# Altium PCB Sensor_PCB_S201_Flex_Sourav.PcbDoc
Units mm, origin at the board's own origin, x right, y up, seen from the top; angles counter-clockwise.
Board outline 122 x 4.1 mm, 2 copper layers (1-SIG-TOP, 2-SIG_BOT), stack 0.109 mm thick; 21 components, 17 nets, 66 pads, 217 vias.
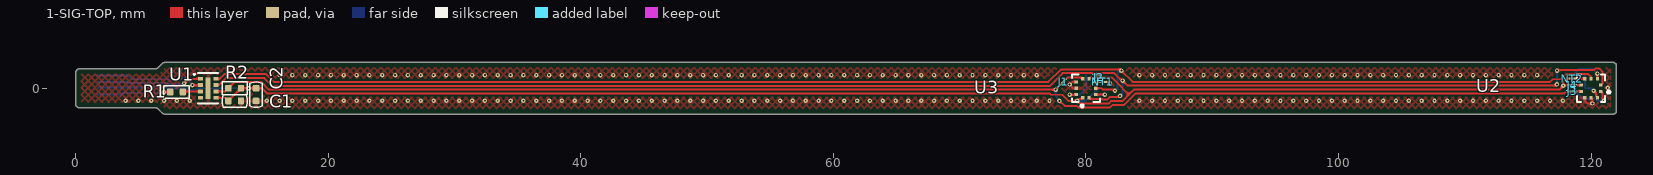
[diagram p0: 1-SIG-TOP view]
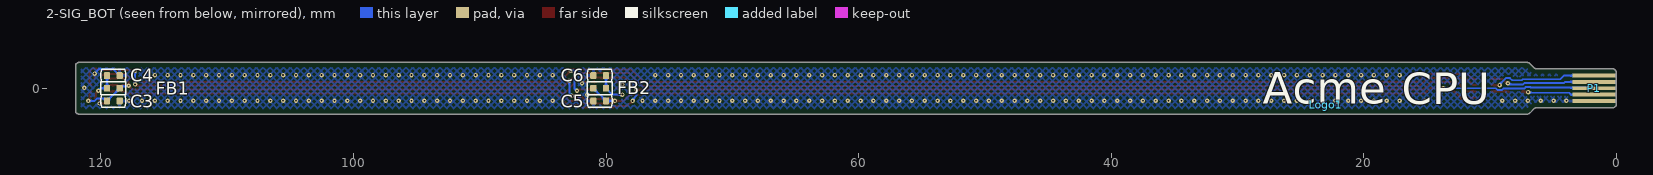
[diagram p1: 2-SIG_BOT view, seen from below]
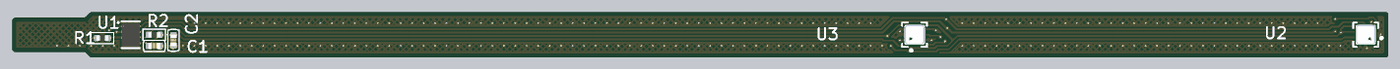
[diagram p2: 3D render of the assembled board from above, using the file's embedded part models]
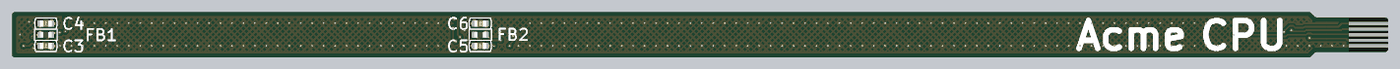
[diagram p3: 3D render of the assembled board from below, using the file's embedded part models]

## Layer stack, top to bottom
Top Solder: solder mask 0.0275, PI + Adhesive, Dk 3.4
1-SIG-TOP: signal copper 0.035
Dielectric 1: dielectric 0.0385, PI, Dk 3.4
2-SIG_BOT: signal copper 0.035
Bottom Solder: solder mask 0.0275, PI + Adhesive, Dk 3.4

## Board outline
6.342,-1.55 cw(c6.346,-1.814) 6.529,-1.624 6.852,-1.948 ccw(c7.1,-1.7) 7.099,-2.05 121.69,-2.05 ccw(c121.695,-1.695) 122,-1.877 122,1.878 ccw(c121.695,1.695) 121.701,2.05 7.1,2.05 ccw(c7.1,1.7) 6.852,1.948 6.529,1.625 cw(c6.353,1.802) 6.353,1.552 0.352,1.552 ccw(c0.352,1.2) 0,1.2 0,-1.2 ccw(c0.325,-1.225) 0.3,-1.55

## Design rules (kind name [scope] priority, off if disabled: settings)
BoardOutlineClearance BoardOutlineClearance_LayerStack [WithinRoom('PCB_Stackup')] p1: gap=0 ignorepadtopadclearanceinfootprint=FALSE
BoardOutlineClearance BoardOutlineClearance_EDGE_Connector [HasFootprint('5-PIN FPC BOARD EDGE CONNECTOR 0.5MM')] p2: gap=0 ignorepadtopadclearanceinfootprint=FALSE
BoardOutlineClearance BoardOutlineClearance_LayerNames [WithinRoom('Layer_Names')] p3: gap=0 ignorepadtopadclearanceinfootprint=FALSE
BoardOutlineClearance BoardOutlineClearance_Overlays [OnBottomSilkscreen or OnTopSilkscreen] p4: gap=0 ignorepadtopadclearanceinfootprint=FALSE
BoardOutlineClearance BoardOutlineClearance_NearEdgeConnector [WithinRoom('NearEdgeConnector_OutlineClearance')] p5 off: gap=0.35 ignorepadtopadclearanceinfootprint=FALSE
BoardOutlineClearance [All] p6: gap=0.35 ignorepadtopadclearanceinfootprint=FALSE
Clearance [All] p1: gap=0.152 ignorepadtopadclearanceinfootprint=FALSE
ComponentClearance ComponentClearance_NetTie [HasFootprint('Net Tie 6x30mil')] p1: gap=0 collisioncheckmode=3 verticalgap=0 showdistances=FALSE
ComponentClearance ComponentClearance_PCB_Stackup [WithinRoom('PCB_Stackup')] p2: gap=0 collisioncheckmode=3 verticalgap=0 showdistances=FALSE
ComponentClearance [All] p3: gap=0.305 collisioncheckmode=3 verticalgap=0 showdistances=FALSE
DiffPairsRouting [All] p1: maxlimit=0.152 minlimit=0.127 mostfreqgap=0.152 toplayer_minwidth=0.127 toplayer_maxwidth=0.152 toplayer_prefwidth=0.152 bottomlayer_minwidth=0.127 bottomlayer_maxwidth=0.152 bottomlayer_prefwidth=0.152 maxuncoupledlength=12.7
HoleSize [All] p1: absolutevalues=TRUE maxlimit=2.54 minlimit=0.15 maxpercent=80.000 minpercent=20.000
HoleToHoleClearance [All] p1: gap=0.254 allowstackedmicrovias=FALSE
MinimumAnnularRing MinimumAnnularRing_Via_Int [IsVia and not (OnTopLayer or OnBottomLayer)] p1: minimumring=0
MinimumAnnularRing [All] p2: minimumring=0.152
MinimumSolderMaskSliver [All] p1: minsoldermaskwidth=0.076
PlaneClearance [All] p1: clearance=0.203
PlaneConnect PlaneConnect_Via [IsVia] p1: planeconnectstyle=Direct reliefexpansion=0.508 reliefentries=4 reliefconductorwidth=0.254 reliefairgap=0.254
PlaneConnect PlaneConnect_HeatTrap [All] p2: pad.planeconnectstyle=Relief pad.reliefexpansion=0.152 pad.reliefentries=4 pad.reliefconductorwidth=0.152 pad.reliefairgap=0.152 via.planeconnectstyle=Direct via.reliefexpansion=0.203 via.reliefentries=4 via.reliefconductorwidth=0.254 via.reliefairgap=0.254
PolygonConnect PolygonConnect_Via [IsVia] p1: connectstyle=Direct reliefconductorwidth=0.254 reliefentries=4 polygonreliefangle="90 Angle" airgapwidth=0.254
PolygonConnect PolygonConnect_TestPoints [InComponentClass('TestPoint')] p2: connectstyle=Direct reliefconductorwidth=0.254 reliefentries=4 polygonreliefangle="90 Angle" airgapwidth=0.254
PolygonConnect PolygonConnect_ThermPads [HasFootprintPad('DFN65P100X40-4N','5') or HasFootprintPad('WSON-6 065','7') or HasFootprintPad('SOT908-1','9')] p3: connectstyle=Direct reliefconductorwidth=0.254 reliefentries=4 polygonreliefangle="90 Angle" airgapwidth=0.254
PolygonConnect [All] p4: thpad.connectstyle=Relief thpad.reliefconductorwidth=0.381 thpad.reliefentries=4 thpad.polygonreliefangle="90 Angle" thpad.airgapwidth=0.203 smdpad.connectstyle=Relief smdpad.reliefconductorwidth=0.254 smdpad.reliefentries=4 smdpad.polygonreliefangle="90 Angle" smdpad.airgapwidth=0.203 via.connectstyle=Direct via.reliefconductorwidth=0.254 via.reliefentries=4 via.polygonreliefangle="90 Angle" via.airgapwidth=0.254
RoomDefinition Layer_Names [False] p1: confinementstyle=ConfineIn formatcopy=TRUE lockcomponents=FALSE outline 127.5,47.5 147.5,47.5 147.5,37.5 127.5,37.5
RoomDefinition NearEdgeConnector_OutlineClearance [False] p2: confinementstyle=ConfineIn formatcopy=TRUE lockcomponents=FALSE outline 0,1.5 7.5,1.5 7.5,-1.5 0,-1.5
RoomDefinition P122 [InComponentClass('P122')] p3: confinementstyle=ConfineIn formatcopy=TRUE lockcomponents=FALSE outline 98,1.5 98,-1.5 102,-1.5 102,1.5
RoomDefinition P121 [InComponentClass('P121')] p4: confinementstyle=ConfineIn formatcopy=TRUE lockcomponents=FALSE outline 78,1.5 78,-1.5 82,-1.5 82,1.5
RoutingVias [All] p1: holewidth=0.15 width=0.5 viastyle="Through Hole" minholewidth=0.15 minwidth=0.35 maxholewidth=0.5 maxwidth=0.7
SilkToSilkClearance [All] p1: silktosilkclearance=0.025
SilkToSolderMaskClearance [IsPad] p1: minsilkscreentomaskgap=0.102 clearancetoexposedcopper=FALSE
SolderMaskExpansion [All] p1: expansion=0.051 istentingtop=FALSE
Width [All] p1: maxlimit=5.08 minlimit=0.152 preferedwidth=0.254
21 further rules are at their usual default settings.

## Classes and differential pairs
component class PCB_FEATURE: Logo1
component class "Net Tie": J1 J3 J4
channel class BMP388_Digital_Pressure_Sensor: P121 P122
component class P122: C5 C6 FB1 NT1 U2
component class P121: C5 C6 FB1 NT1 U2

## Components (designator, comment, footprint, x,y, rotation, side; value= is the part's Value field where it differs from the comment)
C1 "CAP CER 0.1UF 50V X7R 0402" C0402 12.6,-1 r0 top
C2 "CAP CER 1UF 6.3V X5R 0402" C0402 14.3,-0.5 r90 top
C3 "CAP CER 0.1UF 16V X7R 0402" C0402 119.008,-1 r0 bottom (schematic designator C1)
C4 "CAP CER 0.1UF 16V X7R 0402" C0402 119.008,1 r180 bottom (schematic designator C2)
C5 "CAP CER 0.1UF 16V X7R 0402" C0402 80.5,-1 r180 bottom (schematic designator C1)
C6 "CAP CER 0.1UF 16V X7R 0402" C0402 80.5,1 r0 bottom (schematic designator C2)
FB1 "FERRITE BEAD 1 KOHM 0402 1LN" L0402 119.008,0 r0 bottom
FB2 "FERRITE BEAD 1 KOHM 0402 1LN" L0402 80.5,0 r180 bottom (schematic designator FB1)
J1 "Net Tie" "NET TIE 6X30MIL" 78.2,0.5 r45 top net-tie
J2 "Net Tie" "NET TIE 6X30MIL" 81,0.854 r180 top net-tie (schematic designator J3)
J3 "Net Tie" "NET TIE 6X30MIL" 118.49,-0.25 r0 top net-tie (schematic designator J2)
J4 "Net Tie" "NET TIE 6X30MIL" 118.49,0.255 r0 top net-tie
Logo1 "Logo ACME_CPU" LOGO_ACME_CPU 23,-1.3 r180 bottom (schematic designator Logo)
NT1 "Net Tie" "NET TIE 6X30MIL" 81.322,0.5 r0 top net-tie (schematic designator NT2)
NT2 "Net Tie" "NET TIE 6X30MIL" 118.49,0.762 r180 top net-tie (schematic designator NT1)
P1 "S201" "5-PIN FPC BOARD EDGE CONNECTOR 0.5MM" 1.75,0 r0 bottom (schematic designator P20)
R1 "RES SMD 0 OHM JUMPER 1/16W 0402" R0402 8,-0.3 r180 top
R2 "DNP*" R0402 12.6,0 r0 top
U1 "TPD3F303DPVR" DPV8_1P7X0P4 10.5,0 r0 top
U2 "BMP388" QFN_BMP388_BOS 119.99,0 r180 top (schematic designator U1)
U3 "BMP388" QFN_BMP388_BOS 80,0 r90 top (schematic designator U1)

## Footprints (in the part's own frame and the unit in brackets; to place one, negate y for a bottom-side part, rotate by r counter-clockwise, add the part's x,y. Pads: shape width x height; smd on the part's side, far side on the other; paste and mask are expansions set on the pad)
"5-PIN FPC BOARD EDGE CONNECTOR 0.5MM" [mm] "5 Position FFC, FPC Connector Contacts, Top 0.020\" (0.50mm)"
  rect 3.5x0.3 smd paste+0 mask+0: 1(0,-1) 2(0,-0.5) 3(0,0) 4(0,0.5) 5(0,1)
C0402 [mm]
  rrect35% 0.5x0.55 smd: 1(-0.5,0) 2(0.5,0)
  silkscreen extent -1,-0.5 1,0.5, body extent -0.52,-0.28 0.52,0.28, height 0.55
DPV8_1P7X0P4 [mm]
  rect 0.38x0.3 smd paste+0 mask+0.05: 1(-0.61,0.75) 2(-0.61,0.25) 3(-0.61,-0.25) 4(-0.61,-0.75) 5(0.61,-0.75) 6(0.61,-0.25) 7(0.61,0.25) 8(0.61,0.75)
  rect 0.4x1.7 smd paste-0.837 mask+0.05: 9(0,0)
  silkscreen extent -1.15,-1.2 0.8,1.2, body extent -0.8,-1.05 0.8,1.05, height 0.65
L0402 [mm]
  rrect35% 0.5x0.55 smd: 1(-0.5,0) 2(0.5,0)
  silkscreen extent -1,-0.51 1,0.5, body extent -0.53,-0.25 0.53,0.25, height 0.71
LOGO_ACME_CPU [mm]
"NET TIE 6X30MIL" [mil]
  rect 16x6 smd paste-5 mask-5: 1(-7,0) 2(7,0)
QFN_BMP388_BOS [mm]
  rect 0.275x0.25 smd paste+0 mask+0.05: 1(-0.762,0.25) 2(-0.762,-0.25) 6(0.762,-0.25) 7(0.762,0.25)
  rect 0.25x0.275 smd paste+0 mask+0.05: 3(-0.5,-0.762) 4(0,-0.762) 5(0.5,-0.762) 8(0.5,0.762) 9(0,0.762) 10(-0.5,0.762)
  silkscreen extent -1.5,-1.1 1.1,1.1, body extent -1,-1 1,1, height 0.8
R0402 [mm]
  rrect35% 0.5x0.55 smd: 1(-0.5,0) 2(0.5,0)
  silkscreen extent -1,-0.51 1,0.5, body extent -0.53,-0.25 0.53,0.25, height 0.71

## Part data
C1: "0.1µF ±10% 50V Ceramic Capacitor X7R 0402 (1005 Metric)", Capacitance=100nF, Case/Package=0402, Case Code (Metric)=1005, Dielectric=X7R, Manufacturer=TDK, Manufacturer Part Number=CGA2B3X7R1H104K050BB, Max Operating Temperature=125°C, Min Operating Temperature=-55°C, Package Quantity=1, Ratings=AEC-Q200, Supplier Part Number 1=445-6899-1-ND, Tolerance=10%, Voltage=50V, Case Code (Imperial)=0402, ComponentLink1Description=http://product.tdk.com/capacitor/mlcc/en/documents/mlccspec_automotive_general_midvoltage_en.pdf?src-supplier=Future+Electronics, ComponentLink1URL=http://product.tdk.com/capacitor/mlcc/en/documents/mlccspec_automotive_general_midvoltage_en.pdf?src-supplier=Future+Electronics, ComponentLink2Description=http://www.farnell.com/datasheets/1807242.pdf?src-supplier=Element14, ComponentLink2URL=http://www.farnell.com/datasheets/1807242.pdf?src-supplier=Element14, ComponentLink3Description=http://www.mouser.com/ds/2/400/lcc_automotive_general_en-843974.pdf?src-supplier=Mouser, ComponentLink3URL=http://www.mouser.com/ds/2/400/lcc_automotive_general_en-843974.pdf?src-supplier=Mouser, ComponentLink4Description=http://www.farnell.com/datasheets/1936565.pdf?src-supplier=Element14, ComponentLink4URL=http://www.farnell.com/datasheets/1936565.pdf?src-supplier=Element14, ComponentLink5Description=http://www.farnell.com/datasheets/1735392.pdf?src-supplier=Element14, ComponentLink5URL=http://www.farnell.com/datasheets/1735392.pdf?src-supplier=Element14, Composition=Ceramic, Depth=0.5mm, Height=0.5mm, Lead Free="Lead Free", Length=1mm, Mount="Surface Mount", Packaging="Tape and Reel", Pricing 1="1=0.17, 10=0.118, 50=0.0668, 100=0.0553, 500=0.0388, 1000=0.0321, 2500=0.0299, 5000=0.0273 (USD)", REACH SVHC="No SVHC", Stock 1=2925303, Supplier 1=Digi-Key, Termination=SMD/SMT, Thickness=0.022inch, Voltage Rating=50V, Voltage Rating (DC)=50V, Weight=2.3E-05oz, Width=0.02inch
C2: "1µF ±10% 6.3V Ceramic Capacitor X5R 0402 (1005 Metric)", Capacitance=1uF, Case/Package=0402, Case Code (Metric)=1005, Dielectric=X5R, Dielectric Material=Ceramic, Manufacturer=Yageo, Manufacturer Part Number=CC0402KRX5R5BB105, Max Operating Temperature=85°C, Min Operating Temperature=-55°C, Package Quantity=1, Supplier Part Number 1=311-1438-1-ND, Tolerance=10%, Voltage Rating=6.3V, Case Code (Imperial)=0402, ComponentLink1Description=http://www.farnell.com/datasheets/70765.pdf?src-supplier=Farnell, ComponentLink1URL=http://www.farnell.com/datasheets/70765.pdf?src-supplier=Farnell, ComponentLink2Description=http://www.yageo.com/documents/recent/UPY-GPHC_X5R_4V-to-50V_25.pdf?src-supplier=Digi-Key, ComponentLink2URL=http://www.yageo.com/documents/recent/UPY-GPHC_X5R_4V-to-50V_25.pdf?src-supplier=Digi-Key, ComponentLink3Description=http://www.farnell.com/datasheets/2167237.pdf?src-supplier=Element14, ComponentLink3URL=http://www.farnell.com/datasheets/2167237.pdf?src-supplier=Element14, ComponentLink4Description=http://www.yageo.com/documents/recent/UPY-GPHC_X5R_4V-to-50V_12.pdf?src-supplier=Avnet+Europe, ComponentLink4URL=http://www.yageo.com/documents/recent/UPY-GPHC_X5R_4V-to-50V_12.pdf?src-supplier=Avnet+Europe, ComponentLink5Description=http://www.farnell.com/datasheets/1359354.pdf?src-supplier=Element14, ComponentLink5URL=http://www.farnell.com/datasheets/1359354.pdf?src-supplier=Element14, ComponentLink6Description=http://www.farnell.com/datasheets/70765.pdf?src-supplier=Element14, ComponentLink6URL=http://www.farnell.com/datasheets/70765.pdf?src-supplier=Element14, ComponentLink7Description=http://www.yageo.com/documents/recent/UPY-GPHC_X5R_4V-to-50V_12.pdf?src-supplier=Avnet, ComponentLink7URL=http://www.yageo.com/documents/recent/UPY-GPHC_X5R_4V-to-50V_12.pdf?src-supplier=Avnet, Composition=Ceramic, Depth=0.5mm, Halogen Free="Halogen Free", Height=0.5mm, Lead Free="Lead Free", Length=1mm, Mount="Surface Mount", Number of Pins=2, Packaging="Tape and Reel", Pricing 1="1=0.1, 10=0.05, 50=0.0272, 100=0.0222, 500=0.0158, 1000=0.0124, 2500=0.0113, 5000=0.0104 (USD)", Radiation Hardening=No, REACH SVHC="No SVHC", Stock 1=34926286, Supplier 1=Digi-Key, Termination=SMD/SMT, Thickness=0.022inch, Voltage Rating (DC)=6.3V, Width=0.02inch
C3 C4 C5 C6: "0.1µF ±10% 16V Ceramic Capacitor X7R 0402 (1005 Metric)", Capacitance=100nF, Case Code (Imperial)=0402, Case Code (Metric)=1005, Dielectric=X7R, Manufacturer=YAGEO, Manufacturer Part Number=CC0402KRX7R7BB104, Max Operating Temperature=125°C, Min Operating Temperature=-55°C, Package Quantity=1, Supplier Part Number 1=311-1338-1-ND, Tolerance=10%, Voltage=16V, ComponentLink1Description=http://www.yageo.com/documents/recent/UPY-GPHC_X7R_6.3V-to-50V_8.pdf?src-supplier=Avnet+Europe, ComponentLink1URL=http://www.yageo.com/documents/recent/UPY-GPHC_X7R_6.3V-to-50V_8.pdf?src-supplier=Avnet+Europe, ComponentLink2Description=http://www.yageo.com/documents/recent/UPY-GPHC_X7R_6.3V-to-50V_18.pdf?src-supplier=Digi-Key, ComponentLink2URL=http://www.yageo.com/documents/recent/UPY-GPHC_X7R_6.3V-to-50V_18.pdf?src-supplier=Digi-Key, ComponentLink3Description=http://www.yageo.com/documents/recent/UPY-GPHC_X7R_6.3V-to-50V_8.pdf?src-supplier=Avnet, ComponentLink3URL=http://www.yageo.com/documents/recent/UPY-GPHC_X7R_6.3V-to-50V_8.pdf?src-supplier=Avnet, ComponentLink4Description=http://www.yageo.com/documents/recent/UPY-GPHC_X7R_6.3V-to-50V_18.pdf?src-supplier=Mouser, ComponentLink4URL=http://www.yageo.com/documents/recent/UPY-GPHC_X7R_6.3V-to-50V_18.pdf?src-supplier=Mouser, ComponentLink5Description=http://www.farnell.com/datasheets/2167236.pdf?src-supplier=Element14, ComponentLink5URL=http://www.farnell.com/datasheets/2167236.pdf?src-supplier=Element14, ComponentLink6Description=http://www.farnell.com/datasheets/1489800.pdf?src-supplier=Element14, ComponentLink6URL=http://www.farnell.com/datasheets/1489800.pdf?src-supplier=Element14, Composition=Ceramic, Depth=0.5mm, Halogen Free="Halogen Free", Height=0.5mm, Lead Free="Lead Free", Length=1mm, Mount="Surface Mount", Number of Pins=2, Order=CC0402KRX7R7BB104, Packaging="Tape and Reel", Pricing 1="1=0.1, 10=0.031, 100=0.0136, 500=0.0097, 1000=0.0077, 2500=0.007, 5000=0.0064 (USD)", Radiation Hardening=No, REACH SVHC="No SVHC", Revision="July-2002: Re-released for DXP Platform.", Stock 1=25916830, Supplier 1=Digi-Key, Termination=SMD/SMT, Thickness=0.022inch, Voltage Rating=16V, Voltage Rating (DC)=16V, Width=0.02inch
FB1 FB2: "1 kOhms @ 100MHz 1  Ferrite Bead 0402 (1005 Metric) 350mA 490mOhm", Case/Package=0402, Case Code (Metric)=1005, Current Rating=350mA, DC Resistance (DCR)=490mR, Manufacturer=Murata, Manufacturer Part Number=BLM15AX102SN1D, Max Operating Temperature=125°C, Min Operating Temperature=-55°C, Package Quantity=1, Supplier Part Number 1=490-5442-1-ND, Test Frequency=100MHz, Tolerance=25%, Case Code (Imperial)=0402, ComponentLink1Description=https://www.murata.com/en-us/products/productdata/8796740059166/ENFA0018.pdf?src-supplier=Digi-Key, ComponentLink1URL=https://www.murata.com/en-us/products/productdata/8796740059166/ENFA0018.pdf?src-supplier=Digi-Key, ComponentLink2Description=http://search.murata.co.jp/Ceramy/image/img/PDF/ENG/L0110S0100BLM15AX_SN.pdf?src-supplier=Future+Electronics, ComponentLink2URL=http://search.murata.co.jp/Ceramy/image/img/PDF/ENG/L0110S0100BLM15AX_SN.pdf?src-supplier=Future+Electronics, ComponentLink3Description=http://www.produktinfo.conrad.com/datenblaetter/1100000-1199999/001171674-da-01-en-CHIP_DROSSEL0402_1000R_350MA_1_0X0_5MM.pdf?src-supplier=Conrad, ComponentLink3URL=http://www.produktinfo.conrad.com/datenblaetter/1100000-1199999/001171674-da-01-en-CHIP_DROSSEL0402_1000R_350MA_1_0X0_5MM.pdf?src-supplier=Conrad, ComponentLink4Description=http://www.produktinfo.conrad.com/datenblaetter/1100000-1199999/001172166-da-01-en-DROSSEL_0402_1000R_31_0X0_5MM_10000ST.pdf?src-supplier=Conrad, ComponentLink4URL=http://www.produktinfo.conrad.com/datenblaetter/1100000-1199999/001172166-da-01-en-DROSSEL_0402_1000R_31_0X0_5MM_10000ST.pdf?src-supplier=Conrad, Depth=0.5mm, Height=0.5mm, Impedance=1kR, Lead Free="Lead Free", Length=1mm, Material=Ferrite,Steel, Max Current Rating=350mA, Max DC Current=350mA, Number of Circuits=1, Number of Lines=1, Number of Pins=2, Packaging="Tape and Reel", Pricing 1="1=0.11, 10=0.09, 25=0.0812, 50=0.0596, 100=0.0514, 250=0.0406, 500=0.0343, 1000=0.0289, 5000=0.0257 (USD)", REACH SVHC="No SVHC", Stock 1=138597, Supplier 1=Digi-Key, Termination=SMD/SMT, Width=0.5mm
J1 J2 J3 J4 NT1 NT2: library part "Net Tie Line"
  J1 J2 J3 J4: ClassName="Net Tie"
  NT1: ClassName=P121
  NT2: ClassName=P122
P1: library part "CONN HEADER TH R/A 5POS 1.5MM", "Connector Header Through Hole, Right Angle 5 position 0.059\" (1.50mm)", Color=Natural, Contact Resistance=30mR, Current Rating=1A, Housing Color=Beige, Manufacturer=JST, Manufacturer Part Number=S5B-ZR(LF)(SN), Max Operating Temperature=85°C, Max Voltage Rating (AC)=50V, Min Operating Temperature=-25°C, Supplier Part Number 1=455-1672-ND, ComponentLink1Description=http://www.jst-mfg.com/product/pdf/eng/eZH.pdf?src-supplier=Digi-Key, ComponentLink1URL=http://www.jst-mfg.com/product/pdf/eng/eZH.pdf?src-supplier=Digi-Key, ComponentLink2Description=https://www.verical.com/server-webapp/html/getDatasheet?partID=640593&src-supplier=Verical, ComponentLink2URL=https://www.verical.com/server-webapp/html/getDatasheet?partID=640593&src-supplier=Verical, ComponentLink3Description=http://www1.futureelectronics.com/doc/JST/S5B-ZR(LF)(SN).pdf?src-supplier=Future+Electronics, ComponentLink3URL=http://www1.futureelectronics.com/doc/JST/S5B-ZR(LF)(SN).pdf?src-supplier=Future+Electronics, ComponentLink4Description=http://www.produktinfo.conrad.com/datenblaetter/725000-749999/741204-da-01-en-STIFTLEISTE_GEWINKELT_5_POL_RM1_5.pdf?src-supplier=Conrad, ComponentLink4URL=http://www.produktinfo.conrad.com/datenblaetter/725000-749999/741204-da-01-en-STIFTLEISTE_GEWINKELT_5_POL_RM1_5.pdf?src-supplier=Conrad, Connector Type="Male Pin", Contact Material=Brass,Tin, Contact Mating Length=0.094inch, Contact Plating=Tin,Copper, Depth=6mm, Fastening Type=Detent, Gender=Male, Height=7.2mm, Housing Material=Polyamide, Lead Free="Lead Free", Length=9mm, Max Current Rating=1A, Mount="Through Hole", Number of Contacts=5, Number of Pins=5, Number of Positions=5, Number of Rows=1, Orientation="Right Angle", Packaging=Bulk, pin_1=SCL, pin_2=SDA, pin_3=VDD, pin_4=GPIO, pin_5=GND, Pitch=1.5mm, Pricing 1="1=0.29, 10=0.272, 100=0.1889, 500=0.1598, 1000=0.1308, 5000=0.1162, 10000=0.1053 (USD)", Stock 1=41138, Supplier 1=Digi-Key, Termination=Press-Fit, Voltage Rating=50V, Width=3.5mm
R1: "0 Ohms Jumper 0.063W, 1/16W Chip Resistor 0402 (1005 Metric) Moisture Resistant Thick Film", Case/Package=0402, Case Code (Metric)=1005, Manufacturer=Yageo, Manufacturer Part Number=RC0402JR-070RL, Max Operating Temperature=155°C, Max Power Dissipation=63mW, Min Operating Temperature=-55°C, Package Quantity=1, Power Rating=62.5mW, Resistance="0 Ohm", Supplier Part Number 1=311-0.0JRCT-ND, Temperature Coefficient=200ppm/°C, Tolerance=5%, Voltage Rating=50V, Case Code (Imperial)=0402, ComponentLink1Description=http://www.yageo.com/documents/recent/PYu-RC_Group_51_RoHS_L_10.pdf?src-supplier=Digi-Key, ComponentLink1URL=http://www.yageo.com/documents/recent/PYu-RC_Group_51_RoHS_L_10.pdf?src-supplier=Digi-Key, ComponentLink2Description=http://www.yageo.com/documents/recent/PYu-RC0402_51_RoHS_L_6.pdf?src-supplier=Avnet+Europe, ComponentLink2URL=http://www.yageo.com/documents/recent/PYu-RC0402_51_RoHS_L_6.pdf?src-supplier=Avnet+Europe, ComponentLink3Description=http://www.farnell.com/datasheets/1018594.pdf?src-supplier=Element14, ComponentLink3URL=http://www.farnell.com/datasheets/1018594.pdf?src-supplier=Element14, ComponentLink4Description=https://www.verical.com/server-webapp/html/getDatasheet?partID=326379&src-supplier=Verical, ComponentLink4URL=https://www.verical.com/server-webapp/html/getDatasheet?partID=326379&src-supplier=Verical, ComponentLink5Description=http://www.farnell.com/datasheets/2167052.pdf?src-supplier=Element14, ComponentLink5URL=http://www.farnell.com/datasheets/2167052.pdf?src-supplier=Element14, Composition="Thick Film", Contact Plating=Tin,Matte, Depth=0.5mm, Features="Moisture Resistant", Height=0.016inch, Lead Free="Lead Free", Length=1mm, Military Standard=Not, Number of Terminations=2, Packaging="Tape and Reel", Pricing 1="1=0.1, 10=0.013, 25=0.0092, 50=0.0072, 100=0.0053, 250=0.004, 500=0.0032, 1000=0.0024, 5000=0.0017 (USD)", Radiation Hardening=No, REACH SVHC=Unknown, Stock 1=46057148, Supplier 1=Digi-Key, Termination=SMD/SMT, Width=0.02inch
R2: library part "RES SMD NO BOM 0402", "Placeholder for a 0402 resistor", Case/Package=0402
U1: library part "FILTER RC(PI) ESD SMD  8-UFDFN EP", "RC (Pi) EMI Filter 2nd Order Low Pass 3 Channel R = 47Ohms, 100Ohms, C = 20pF  8-UFDFN Exposed Pad", Capacitance=20pF, Case/Package=SMD/SMT, Clamping Voltage=10V, Frequency=308MHz, Manufacturer="Texas Instruments", Max Operating Temperature=85°C, Min Operating Temperature=-40°C, Operating Supply Voltage=5.5V, Package Quantity=1, Supplier Part Number 1=296-28299-1-ND, ComponentLink1Description=http://www.ti.com/lit/ds/symlink/tpd3f303.pdf?src-supplier=Digi-Key, ComponentLink1URL=http://www.ti.com/lit/ds/symlink/tpd3f303.pdf?src-supplier=Digi-Key, ComponentLink2Description=http://focus.ti.com/lit/ds/symlink/tpd3f303.pdf?src-supplier=Avnet+Europe, ComponentLink2URL=http://focus.ti.com/lit/ds/symlink/tpd3f303.pdf?src-supplier=Avnet+Europe, ComponentLink3Description=https://www.verical.com/server-webapp/html/getDatasheet?partID=302817&src-supplier=Verical, ComponentLink3URL=https://www.verical.com/server-webapp/html/getDatasheet?partID=302817&src-supplier=Verical, ComponentLink4Description=http://www.farnell.com/datasheets/1558442.pdf?src-supplier=Element14, ComponentLink4URL=http://www.farnell.com/datasheets/1558442.pdf?src-supplier=Element14, Contact Plating=Gold, Depth=1.7mm, ESD Protection=Yes, Height=0.026inch, Lead Free="Lead Free", Length=2.2mm, Manufacturer Part Number=TPD3F303DPVR, Number of Channels=3, Number of Pins=8, Packaging="Tape and Reel", Pricing 1="1=0.85, 10=0.812, 25=0.7856, 50=0.6414, 100=0.576, 250=0.5236, 500=0.4974, 1000=0.4451 (USD)", Radiation Hardening=No, REACH SVHC="No SVHC", Stock 1=4896, Supplier 1=Digi-Key, Termination=Flat, Width=0.063inch
U2 U3: library part "IC BMP388 SENSOR PRESSURE ABS", "Pressure Sensor 4.35PSI ~ 18.13PSI (30kPa ~ 125kPa) Absolute   10-WFLGA", Capacitance=4.7uF, Case/Package=LGA, Case Code (Imperial)=0805, Case Code (Metric)=2012, Continuous Drain Current (ID)=4A, Drain to Source Voltage (Vdss)=30V, Input Capacitance=645pF, Manufacturer="Bosch Sensortec", Max Operating Temperature=150°C, Max Power Dissipation=1.4W, Min Operating Temperature=-55°C, Operating Pressure=18.13PSI, Ratings=AEC-Q200, Supplier Part Number 1=828-1079-1-ND, Tolerance=20%, Voltage Rating=16V, ComponentLink1Description=https://ae-bst.resource.bosch.com/media/_tech/media/datasheets/BST-BMP388-DS001.pdf?src-supplier=Digi-Key, ComponentLink1URL=https://ae-bst.resource.bosch.com/media/_tech/media/datasheets/BST-BMP388-DS001.pdf?src-supplier=Digi-Key, ComponentLink2Description=https://ae-bst.resource.bosch.com/media/_tech/media/product_flyer/BST-BMP388-FL000-00.pdf?src-supplier=Digi-Key, ComponentLink2URL=https://ae-bst.resource.bosch.com/media/_tech/media/product_flyer/BST-BMP388-FL000-00.pdf?src-supplier=Digi-Key, ComponentLink3Description=https://ae-bst.resource.bosch.com/media/_tech/media/application_notes/BST-BMP380-HS000.pdf?src-supplier=Digi-Key, ComponentLink3URL=https://ae-bst.resource.bosch.com/media/_tech/media/application_notes/BST-BMP380-HS000.pdf?src-supplier=Digi-Key, Features="Soft Termination", Manufacturer Part Number=BMP388, Mount="Surface Mount", Number of Pins=10, Output Type=SPI,I2C, Packaging="Tape and Reel", Port Style="No Port", Pressure Type=Absolute, Pricing 1="1=3.81, 5=3.366, 10=2.973, 25=2.4124, 50=2.1318, 100=2.0757, 500=1.7391, 1000=1.6269, 5000=1.5147 (USD)", Rds On Max=50mR, Stock 1=30816, Supplier 1=Digi-Key, Termination=SMD/SMT
Logo1: ClassName=PCB_FEATURE

## Via types
v1: diameter 0.35, hole 0.15, 1-SIG-TOP to 2-SIG_BOT, tented both sides, 217 vias

## Nets (pads, with @x,y where several pads share a name; then routed paths per layer and width w, separated by ;. In a path a pad name is that pad's centre, name@x,y a point inside that pad or via, vN(x,y) a via of type N, cw(c..) or ccw(c..) an arc to the next point about the centre after c; other vN are vias at no path point)
+3V3: C1.1 C2.2 C3.2 C5.2 FB1.1 FB2.1 J2.1 J4.1 NT2.2 P1.3 R2.2 U1.5 U2.1 U3.1 | length 132.1
  1-SIG-TOP w0.152: U1.5 11.85,-0.75 C1.1 R2.2 v1(13.7,0) C2.2 14.769,0 15.183,-0.414 77.12,-0.414 77.219,-0.513 78.113,-0.513 78.6,-1 v1@79.288,-1 ; v1@79.323,-0.965 79.434,-0.854 79.658,-0.854 U3.1 ; J2.1 82.046,0.854 82.404,0.496 83.4,-0.5 ; J4.1 117.845,0.255 v1(117.79,0.2) ; NT2.2 118.052,0.762 117.79,0.5 v1(117.79,0.2) ; U2.1 120.879,-0.377 120.879,-0.889 v1(120.99,-1) ; v1@79.288,-1 v1@79.3,-0.988 ; v1@79.288,-1 v1(79.3,-1) v1@79.3,-0.988 ; v1@79.3,-0.988 79.52,-1.208 81.793,-1.208 81.997,-1.005 82.895,-1.005 83.4,-0.5 ; 83.4,-0.5 83.8,-0.1 117.49,-0.1 v1(117.79,0.2)
  2-SIG_BOT w0.152: P1.3 1.801,0.051 6.78,0.051 6.833,0.104 7.167,0.104 7.274,-0.004 8.926,-0.004 8.929,0 9.083,-0.154 9.417,-0.154 9.571,0 v1(13.7,0) ; v1(79.3,-1) 79.4,-1 C5.2 FB2.1 ; v1(117.79,0.2) 117.828,0.162 118.345,0.162 FB1.1 C3.2 119.508,-0.981 119.681,-0.808 119.929,-0.808 119.94,-0.797 120.275,-0.797 120.478,-1 v1@121.007,-1
\INT: J1.1 J3.1 R2.1 U1.6 | length 109.9
  1-SIG-TOP w0.152: U1.6 11.85,-0.25 R2.1 12.604,0.504 14.696,0.504 15.31,-0.11 v1(77.59,-0.11) J1.1 ; v1(77.9,-1) 78.303,-1.404 79.284,-1.404 79.394,-1.513 81.92,-1.513 82.123,-1.31 83.021,-1.31 83.926,-0.405 117.874,-0.405 118.029,-0.25 J3.1
  2-SIG_BOT w0.152: v1(77.59,-0.11) 77.59,-0.59 77.9,-0.9 v1(77.9,-1)
\P121.INT: J1.2 U3.7 | length 1.6
  1-SIG-TOP w0.152: J1.2 78.554,0.854 79.658,0.854 U3.7
\P122.INT: J3.2 U2.7 | length 0.6
  1-SIG-TOP w0.152: J3.2 U2.7
GND: C1.2 C2.1 C3.1 C4.2 C5.1 C6.2 NT1.2 P1.5 U1.9 U2.3 U2.8 U2.9 U3.3 U3.8 U3.9 | length 6.6
  1-SIG-TOP w0.152: U3.9 79,0 v1(78.7,0.3) 78.9,0.5 U3.8 ; U3.3 v1(81.5,-0.5) ; NT1.2 81.8,0.5 v1(81.9,0.4) ; U2.8 119.49,-1 119.69,-1.2 v1@120.09,-1.2 ; U2.9 120.09,-0.862 v1@120.09,-1.2 ; v1(120.099,-1.209) v1@120.09,-1.2 ; U2.3 v1(120.49,1.154)
  2-SIG_BOT w0.152: C4.2 119.021,1.514 120.147,1.514 v1@120.508,1.154
  other v1: 3.962,-0.988 4.978,-0.988 5.994,-0.988 7.01,-0.988 8.026,-0.988 9.042,-0.988 15.138,-0.988 16.154,-0.988 17.17,-0.988 18.186,-0.988 19.202,-0.988 20.218,-0.988 21.234,-0.988 22.25,-0.988 23.266,-0.988 24.282,-0.988 25.298,-0.988 26.314,-0.988 27.33,-0.988 28.346,-0.988 29.362,-0.988 30.378,-0.988 31.394,-0.988 32.41,-0.988 33.426,-0.988 34.442,-0.988 35.458,-0.988 36.474,-0.988 37.49,-0.988 38.506,-0.988 39.522,-0.988 40.538,-0.988 41.554,-0.988 42.57,-0.988 43.586,-0.988 44.602,-0.988 45.618,-0.988 46.634,-0.988 47.65,-0.988 48.666,-0.988 49.682,-0.988 50.698,-0.988 51.714,-0.988 52.73,-0.988 53.746,-0.988 54.762,-0.988 55.778,-0.988 56.794,-0.988 57.81,-0.988 58.826,-0.988 59.842,-0.988 60.858,-0.988 61.874,-0.988 62.89,-0.988 63.906,-0.988 64.922,-0.988 65.938,-0.988 66.954,-0.988 67.97,-0.988 68.986,-0.988 70.002,-0.988 71.018,-0.988 72.034,-0.988 73.05,-0.988 74.066,-0.988 75.082,-0.988 76.098,-0.988 77.114,-0.988 84.226,-0.988 85.242,-0.988 86.258,-0.988 87.274,-0.988 88.29,-0.988 89.306,-0.988 90.322,-0.988 91.338,-0.988 92.354,-0.988 93.37,-0.988 94.386,-0.988 95.402,-0.988 96.418,-0.988 97.434,-0.988 98.45,-0.988 99.466,-0.988 100.482,-0.988 101.498,-0.988 102.514,-0.988 103.53,-0.988 104.546,-0.988 105.562,-0.988 106.578,-0.988 107.594,-0.988 108.61,-0.988 109.626,-0.988 110.642,-0.988 111.658,-0.988 112.674,-0.988 113.69,-0.988 114.706,-0.988 115.722,-0.988 116.738,-0.988 117.754,-0.988 121.31,0.028 16.154,1.044 17.17,1.044 18.186,1.044 19.202,1.044 20.218,1.044 21.234,1.044 22.25,1.044 23.266,1.044 24.282,1.044 25.298,1.044 26.314,1.044 27.33,1.044 28.346,1.044 29.362,1.044 30.378,1.044 31.394,1.044 32.41,1.044 33.426,1.044 34.442,1.044 35.458,1.044 36.474,1.044 37.49,1.044 38.506,1.044 39.522,1.044 40.538,1.044 41.554,1.044 42.57,1.044 43.586,1.044 44.602,1.044 45.618,1.044 46.634,1.044 47.65,1.044 48.666,1.044 49.682,1.044 50.698,1.044 51.714,1.044 52.73,1.044 53.746,1.044 54.762,1.044 55.778,1.044 56.794,1.044 57.81,1.044 58.826,1.044 59.842,1.044 60.858,1.044 61.874,1.044 62.89,1.044 63.906,1.044 64.922,1.044 65.938,1.044 66.954,1.044 67.97,1.044 68.986,1.044 70.002,1.044 71.018,1.044 72.034,1.044 73.05,1.044 74.066,1.044 75.082,1.044 76.098,1.044 84.226,1.044 85.242,1.044 86.258,1.044 87.274,1.044 88.29,1.044 89.306,1.044 90.322,1.044 91.338,1.044 92.354,1.044 93.37,1.044 94.386,1.044 95.402,1.044 96.418,1.044 97.434,1.044 98.45,1.044 99.466,1.044 100.482,1.044 101.498,1.044 102.514,1.044 103.53,1.044 104.546,1.044 105.562,1.044 106.578,1.044 107.594,1.044 108.61,1.044 109.626,1.044 110.642,1.044 111.658,1.044 112.674,1.044 113.69,1.044 114.706,1.044 115.722,1.044
I2C.SCL: U1.7 U2.2 U3.2 | length 117.4
  1-SIG-TOP w0.152: U1.7 11.35,0.25 11.908,0.808 14.95,0.808 15.563,0.195 77.156,0.195 78.156,1.195 82.234,1.195 82.829,0.6 v1(82.9,0.6) 83.295,0.205 117.189,0.205 v1(117.287,0.304) ; U3.2 80.342,-0.854 81.283,-0.854 81.333,-0.904 81.667,-0.904 81.871,-0.7 82.6,-0.7 v1(82.7,-0.6) ; v1(117.29,1.4) 117.323,1.433 120.198,1.433 120.323,1.557 120.657,1.557 120.893,1.321 120.893,0.392 U2.2
  2-SIG_BOT w0.152: v1(82.7,-0.6) 82.9,-0.4 ; 82.9,-0.4 v1(82.9,0.6) ; v1(117.29,1.4) 117.289,1.399 117.289,0.32 117.305,0.304 v1@117.308,0.306
I2C.SDA: U1.8 U2.4 U3.4 | length 114.2
  1-SIG-TOP w0.152: U1.8 11.419,0.75 11.782,1.113 15.087,1.113 15.7,0.5 77.03,0.5 78.03,1.5 82.701,1.5 v1(82.804,1.397) 83.691,0.51 116.74,0.51 116.942,0.711 117.57,0.711 117.747,0.888 117.987,1.128 119.762,1.128 119.99,0.9 U2.4 ; U3.4 81.229,0 81.329,-0.1 81.333,-0.096 82.196,-0.096 v1(82.3,-0.2)
  2-SIG_BOT w0.152: v1(82.3,-0.2) 82.496,-0.004 82.496,1.067 82.5,1.071 82.5,1.4 82.503,1.397 v1(82.804,1.397)
NetC4_1: C6.1 FB2.2 U3.10 | length 3
  1-SIG-TOP w0.152: v1(78.7,-0.5) U3.10
  2-SIG_BOT w0.152: v1(78.7,-0.5) 79.5,-0.5 FB2.2 C6.1
NetC6_1: C4.1 FB1.2 U2.10 | length 2.5
  1-SIG-TOP w0.152: v1(120.19,-0.2) 120.386,-0.396 120.386,-0.658 U2.10
  2-SIG_BOT w0.152: C4.1 FB1.2 120.008,0 v1@120.208,-0.2
NetJ3_2: J2.2 U3.6 | length 0.6
  1-SIG-TOP w0.152: U3.6 80.262,0.762 80.354,0.854 J2.2
NetJ4_2: J4.2 U2.6 | length 0.6
  1-SIG-TOP w0.152: J4.2 119.222,0.255 U2.6
NetR1_1: R1.1 U1.3 | length 1.4
  1-SIG-TOP w0.152: R1.1 8.55,-0.25 U1.3
P20_GPIO: P1.4 R1.2 | length 5.9
  1-SIG-TOP w0.152: v1(7,-0.3) 7.3,-0.3 7.4,-0.2 R1.2
  2-SIG_BOT w0.152: P1.4 3.6,-0.5 3.744,-0.356 6.944,-0.356 v1(7,-0.3)
P20_SCL: P1.1 U1.2 | length 8.6
  1-SIG-TOP w0.152: v1(9.25,0.25) U1.2
  2-SIG_BOT w0.152: P1.1 4.156,1 4.443,0.713 7.42,0.713 7.498,0.635 8.264,0.635 8.433,0.804 8.767,0.804 9.25,0.321 v1(9.25,0.25)
P20_SDA: P1.2 U1.1 | length 8.4
  1-SIG-TOP w0.152: v1(8.6,0.4) 8.7,0.4 9.05,0.75 U1.1
  2-SIG_BOT w0.152: P1.2 4.071,0.5 4.162,0.408 7.293,0.408 7.397,0.305 8.505,0.305 v1(8.6,0.4)
P121.A0: NT1.1 U3.5 | length 0.4
  1-SIG-TOP w0.152: U3.5 NT1.1
P122.A0: NT2.1 U2.5 | length 0.8
  1-SIG-TOP w0.152: NT2.1 U2.5
pads on no net: U1.4

## Polygon pours and split planes (outlines as drawn)
no net on PCB Mech TOP "NONET_L-01_P-001" (solid): 78,2 78,-2 121.7,-2 ccw(c121.7,-1.7) 122,-1.7 122,1.7 ccw(c121.7,1.7) 121.7,2
GND on 1-SIG-TOP "GND_L01_P112" (hatched 45Degree grid 0.381 track 0.152, remove dead copper, pour order 112): 0,2 122,2 122,-2 0,-2
GND on 2-SIG_BOT "GND_L02_P131" (hatched 45Degree grid 0.381 track 0.152, remove dead copper, pour order 131): 0.032,2 122,2 122,-2 0.032,-2

## Keep-outs
Keep-Out Layer:
  text "'.Layer_Name'" at 130,2.5 h2.5

## Other copper
1-SIG-TOP:
  text "'.Layer_Name'" at 130,42.5 h2.5
2-SIG_BOT:
  text "'.Layer_Name'" at 145,40 h2.5

## Silkscreen, mask and mechanical layers (free items; w line width, h text height)
Top Overlay:
  text "'.Layer_Name'" at 130,2.5 h2.5
Bottom Overlay:
  text "'.Layer_Name'" at 145,0 h2.5
Top Paste:
  text "'.Layer_Name'" at 130,17.5 h2.5
Bottom Paste:
  text "'.Layer_Name'" at 145,15 h2.5
Top Solder:
  text "'.Layer_Name'" at 130,12.5 h2.5
Bottom Solder:
  text "'.Layer_Name'" at 145,10 h2.5
Drill Guide:
  text "'.Layer_Name'" at 130,5 h2.5
PCB Mech TOP:
  pour cut-out: 118.7,1.3 121.3,1.3 121.3,-1.3 118.7,-1.3
  pour cut-out: 78.7,1.3 81.3,1.3 81.3,-1.3 78.7,-1.3
  lines w0.05: 79.5,0 80.5,0 ; 80,-0.5 80,0.5 ; 119.5,0 120.5,0 ; 120,-0.5 120,0.5
  lines w0.2: 78,-2 121.7,-2 ccw(c121.7,-1.7) 122,-1.7 122,1.7 ccw(c121.7,1.7) 121.7,2 78,2 78,-2 ; 78.7,-1.3 81.3,-1.3 81.3,1.3 78.7,1.3 78.7,-1.3 ; 118.7,-1.3 118.7,1.3 121.3,1.3 121.3,-1.3 118.7,-1.3
  text "Stiffener" at -0.2,5.3 h2.5
  text "Tesa_8854 tape" at 91.389,4.089 h2.5
Dimensions:
  text "'.Layer_Name'" at 130,35 h2.5
Fiducials:
  text "'.Layer_Name'" at 130,32.5 h2.5
Outline:
  lines w0.1: 6.353,-1.501 cw(c6.353,-1.801) 6.565,-1.589 6.888,-1.912 ccw(c7.1,-1.7) 7.1,-2 15.4,-2 77.1,-2 82,-2 118,-2 ; 6.353,-1.5 0.3,-1.5 cw(c0.3,-1.2) 0,-1.2 0,1.2 cw(c0.3,1.2) 0.3,1.5 6.353,1.5 ; 6.353,1.501 ccw(c6.353,1.801) 6.565,1.589 6.888,1.912 cw(c7.1,1.7) 7.1,2 15.4,2 77.1,2 82,2 118,2 121.7,2 ; 117.99,-2 121.69,-2 ; 121.7,-2 ccw(c121.7,-1.7) 122,-1.7 122,-0.85 122,0.85 ; 121.7,1.998 cw(c121.7,1.7) 121.998,1.7 ; 122,0.63 122,1.702
  text "'.Layer_Name'" at 130,30 h2.5
3D Body TOP:
  text "'.Layer_Name'" at 130,27.5 h2.5
TOP ASSY:
  text "'.Layer_Name'" at 130,17.5 h2.5
Courtyard TOP:
  text "'.Layer_Name'" at 130,25 h2.5
PCB Sheet:
  lines w0.7: -25.88,-228.2 -25.88,68.8 ; -25.88,-153.95 -20.88,-153.95 ; -25.88,-79.7 -20.88,-79.7 ; -25.88,-5.45 -20.88,-5.45 ; -20.88,-192.513 44.727,-192.513 82.827,-192.513 159.12,-192.513 ; 17.227,-223.2 17.227,-192.513 ; 17.227,-215.373 159.12,-215.373 ; 17.227,-207.753 159.12,-207.753 ; 17.227,-200.133 159.12,-200.133 ; 39.19,-228.2 39.19,-223.2 ; 39.19,63.8 39.19,68.8 ; 72.667,-223.2 72.667,-207.753 72.667,-192.513 ; 99.12,-228.2 99.12,-223.2 ; 99.12,63.8 99.12,68.8 ; 126.007,-223.2 126.007,-207.753 ; 159.12,-153.95 164.12,-153.95 ; 159.12,-79.7 164.12,-79.7 ; 159.12,-5.45 164.12,-5.45 ; -45.88,-228.2 164.12,-228.2 164.12,68.8 -45.88,68.8 -45.88,-228.2 ; -20.88,-223.2 -20.88,63.8 159.12,63.8 159.12,-223.2 -20.88,-223.2
  text "1" at 9.12,65.3 h1.78
  text "2" at 69.12,65.3 h1.78
  text "3" at 129.12,65.3 h1.78
  text "A" at -23.88,29.175 h1.78
  text "A" at 161.12,29.175 h1.78
  text "'.Layer_Name'" at 130,22.5 h2.5
  text "B" at -23.88,-45.075 h1.78
  text "B" at 161.12,-45.075 h1.78
  text "C" at -23.88,-119.325 h1.78
  text "C" at 161.12,-119.325 h1.78
  text "D" at -23.88,-191.575 h1.78
  text "D" at 161.12,-191.575 h1.78
  text "ENGINEER:" at 18.497,-195.053 h1.14
  text "PROJECT NAME:" at 73.937,-195.053 h1.14
  text "'.ProjectName'" at 87.71,-198.2 h3
  text "'._HWEngineer'" at 20.909,-198.445 h1.52
  text "PCB DESIGNER:" at 18.497,-202.546 h1.14
  text "BOARD NAME:" at 73.937,-202.553 h1.14
  text "'._CompanyName'" at -15.88,-204.2 h1.78
  text "'._BoardName'" at 87.71,-205.95 h3
  text "'._HWEngineer'" at 20.782,-206.192 h1.52
  text "'._address1'" at -15.88,-209.2 h1.78
  text "DATE:" at 18.497,-210.293 h1.14
  text "PART NO.:" at 73.937,-210.293 h1.14
  text "Ver:" at 127.277,-210.293 h1.14
  text "'._address2'" at -15.88,-211.7 h1.78
  text "'._Revision'" at 136.365,-212.96 h3
  text "'._DocumentDate'" at 20.782,-213.05 h1.78
  text "'._PCBModel'" at 87.71,-213.7 h3
  text "'._address3'" at -15.88,-214.2 h1.27
  text "'._address4'" at -15.88,-216.7 h1.27
  text "FILE NAME:" at 18.497,-217.913 h1.14
  text "SCH. NO.:" at 73.937,-217.913 h1.14
  text "SCALE:" at 127.277,-217.913 h1.14
  text "A4 M1:1" at 137,-220.58 h3
  text "'.ProjectNumber'" at 87.71,-221.2 h3
  text "'.Pcb_File_Name_No_Path'" at 20.846,-221.339 h1.78
  text "1" at 9.12,-226.7 h1.78
  text "2" at 69.12,-226.7 h1.78
  text "3" at 129.12,-226.7 h1.78
Drill Drawing:
  text "'.Layer_Name'" at 130,-2.5 h2.5
  text ".Legend" at -17.5,-185 h3.5
Courtyard BOT:
  text "'.Layer_Name'" at 145,20 h2.5
BOT ASSY:
  text "'.Layer_Name'" at 145,7.5 h2.5
Layer Stack:
  drawing of 317 lines, arcs and shapes, not listed
  text "'.Layer_Name'" at 130,-5.5 h2.5
  text "Layer" at 12.525,-152.855 h1.52
  text "Name" at 22.937,-152.855 h1.52
  text "Material" at 46.552,-152.855 h1.52
  text "Thickness" at 68.898,-152.855 h1.52
  text "Constant" at 85.404,-152.855 h1.52
  text "Board Layer Stack" at 99.878,-152.855 h1.52
  text "Top Overlay" at 22.937,-155.903 h1.52
  text "Top Solder" at 22.937,-158.951 h1.52
  text "PI + Adhesive" at 46.552,-158.951 h1.52
  text "0.028mm" at 68.898,-158.951 h1.52
  text "3.4" at 85.404,-158.951 h1.52
  text "1" at 12.525,-161.999 h1.52
  text "1-SIG-TOP" at 22.937,-161.999 h1.52
  text "Copper" at 46.552,-161.999 h1.52
  text "0.035mm" at 68.898,-161.999 h1.52
  text "Dielectric 1" at 22.937,-165.047 h1.52
  text "PI" at 46.552,-165.047 h1.52
  text "0.038mm" at 68.898,-165.047 h1.52
  text "3.4" at 85.404,-165.047 h1.52
  text "2" at 12.525,-168.095 h1.52
  text "2-SIG_BOT" at 22.937,-168.095 h1.52
  text "Copper" at 46.552,-168.095 h1.52
  text "0.035mm" at 68.898,-168.095 h1.52
  text "Bottom Solder" at 22.937,-171.143 h1.52
  text "PI + Adhesive" at 46.552,-171.143 h1.52
  text "0.028mm" at 68.898,-171.143 h1.52
  text "3.4" at 85.404,-171.143 h1.52
  text "Bottom Overlay" at 22.937,-174.191 h1.52

## Dimensions
0,-1.2 to 10.5,0.2 on Dimensions
0.3,1.2 to -3.028,6.964 on Dimensions
121.7,1.7 to 123.34,4.558 on Dimensions
7.1,1.7 to 6.2,4.9 on Dimensions
0.3,-1.5 to 0.3,1.5 on Dimensions
117.99,-2 to 118,2 on Dimensions
0,1.2 to 5,0 on Dimensions
120,0.5 to 80,0.5 on PCB Mech TOP
78.7,1.3 to 81.3,1.3 on PCB Mech TOP
122,-1.7 to 0,1.2 on PCB Mech TOP
122,-1.7 to 78,-2 on PCB Mech TOP
0.3,1.2 to -3.042,6.989 on PCB Mech TOP
-0.01,1.499 to -0.01,-1.501 on PCB Mech TOP
121.7,1.7 to 123.524,4.54 on PCB Mech TOP
121.7,2 to 121.7,-2 on PCB Mech TOP
122,-1.7 to 120,0.5 on PCB Mech TOP
5,1.5 to 0,1.2 on PCB Mech TOP

## Text inside footprints (layer, text, board x,y; h text height)
Logo1: Bottom Overlay "Acme" at 27.991,-1.245 h2.5; Bottom Overlay "CPU" at 16.98,-1.249 h2.5